# Altium PCB shouhuoj.PcbDoc
Units mm, origin at the board's own origin, x right, y up, seen from the top; angles counter-clockwise.
Board outline 125.22 x 80.26 mm, 2 copper layers (Top Layer, Bottom Layer); 36 components, 52 nets, 207 pads, 0 vias.
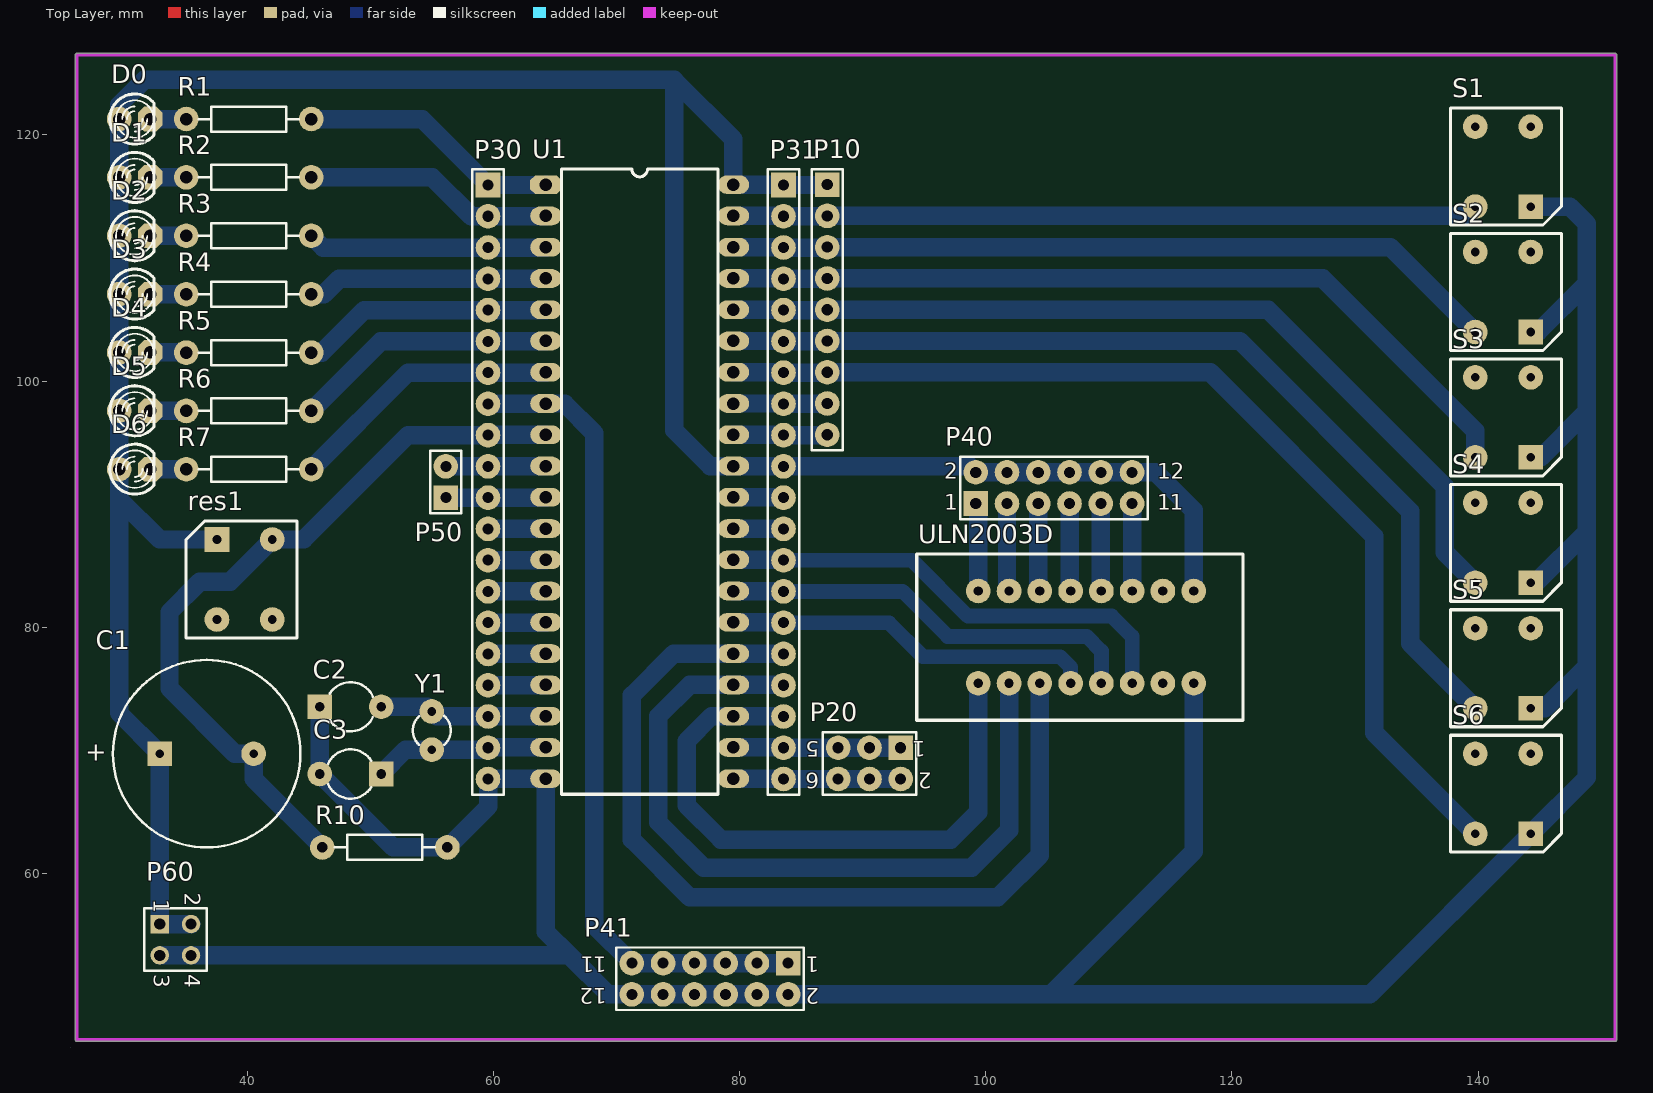
[diagram p0: Top Layer view]
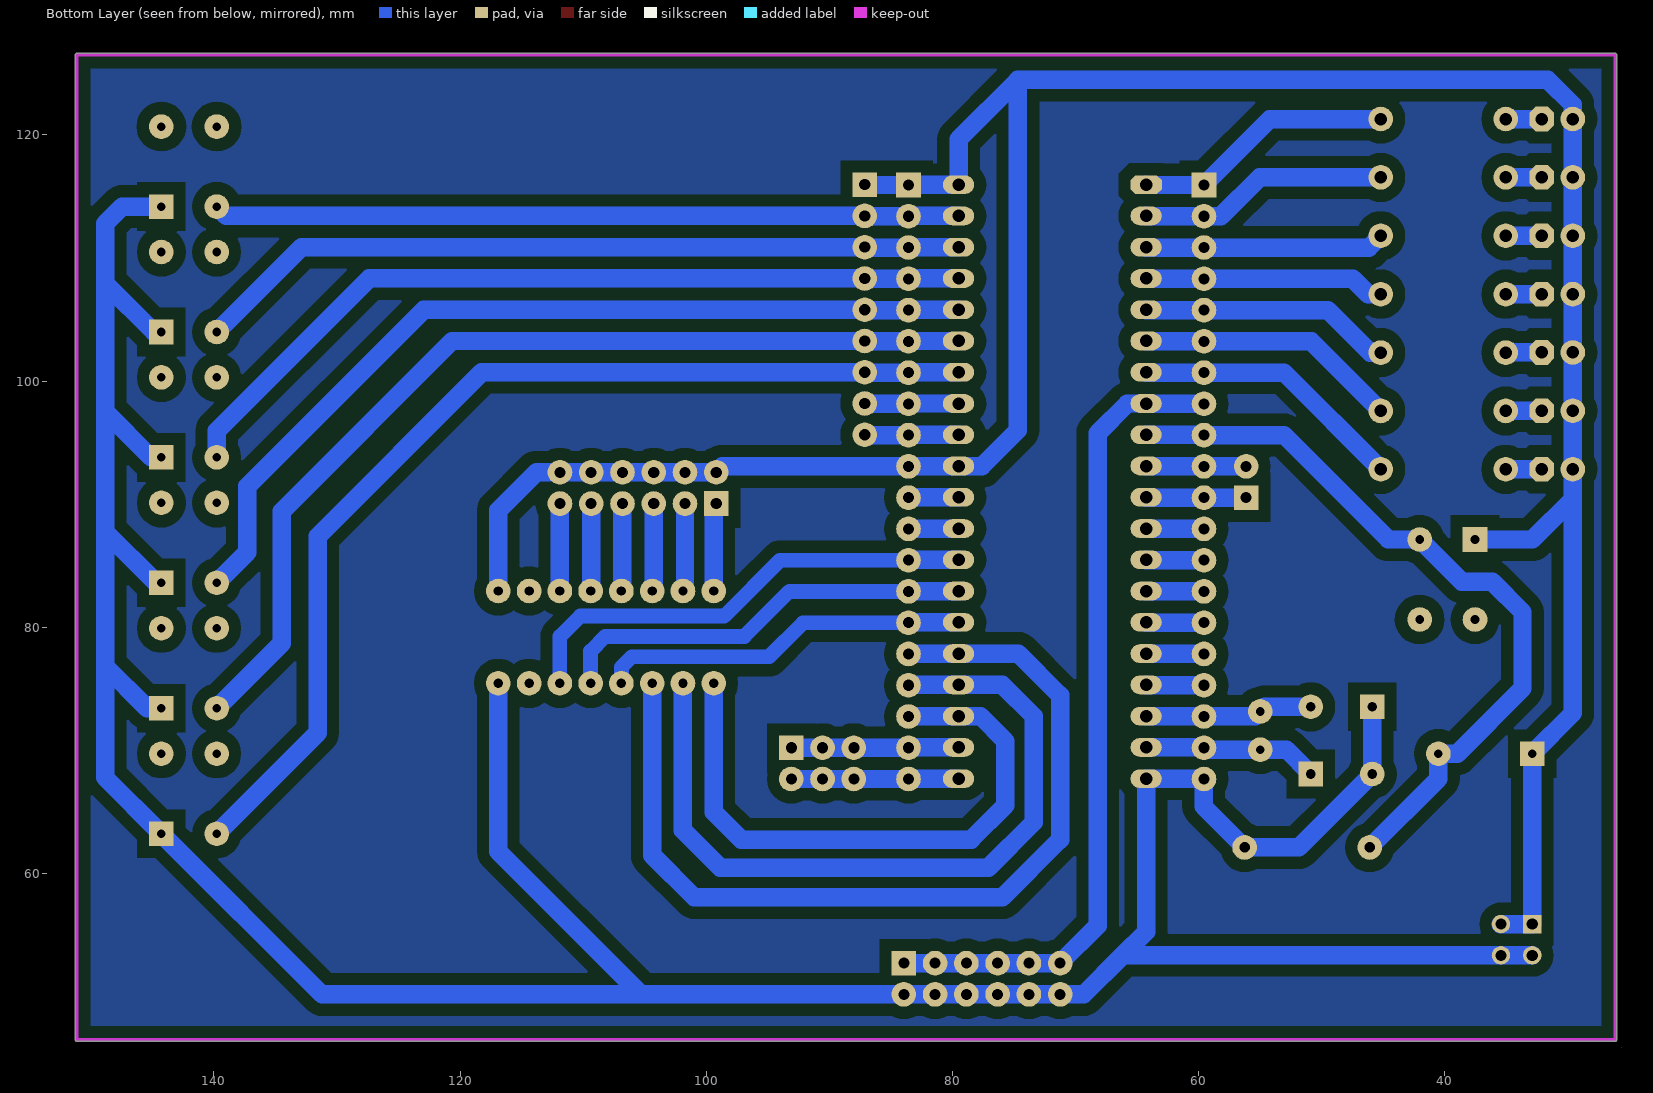
[diagram p1: Bottom Layer view, seen from below]

## Layer stack, top to bottom
Top Solder: solder mask 0.0102, Solder Resist, Dk 3.5
Top Layer: signal copper 0.0356
Dielectric1: dielectric 0.32, FR-4, Dk 4.8
Bottom Layer: signal copper 0.0356
Bottom Solder: solder mask 0.0102, Solder Resist, Dk 3.5

## Board outline
26.162,46.355 cw(c26.162,46.482) 26.035,46.482 26.035,126.492 cw(c26.162,126.492) 26.162,126.619 151.13,126.619 cw(c151.13,126.492) 151.257,126.492 151.257,46.482 cw(c151.13,46.482) 151.13,46.355
cut-out: 25.654,45.847

## Design rules (kind name [scope] priority, off if disabled: settings)
Clearance [All] p1: gap=0.254 ignorepadtopadclearanceinfootprint=FALSE
FabricationTestPointUsage TestPointUsage [All] p1: valid=0 allowmultiple=FALSE
FabricationTestpoint Testpoint [All] p1: side=3 testpointundercomponent=TRUE minsize=1.016 maxsize=2.54 preferedsize=1.524 minholesize=0 maxholesize=1.016 preferedholesize=0.813 testpointgrid=0.025 allowsidetop=TRUE allowsidebottom=TRUE usegrid=TRUE gridtolerance=0
PolygonConnect [All] p1: connectstyle=Relief reliefconductorwidth=0.254 reliefentries=4 polygonreliefangle="90 Angle" airgapwidth=0.254
RoutingLayers [All] p1: top layer_v5=FALSE bottom layer_v5=TRUE
RoutingVias [All] p1: holewidth=0.711 width=1.27 viastyle="Through Hole" minholewidth=0.711 minwidth=1.27 maxholewidth=0.711 maxwidth=1.27
SilkToSolderMaskClearance SilkscreenOverComponentPads [IsPad] p1: minsilkscreentomaskgap=0.254 clearancetoexposedcopper=TRUE
SolderMaskExpansion [All] p1: expansion=0.102
Width [All] p1: maxlimit=1.5 minlimit=1.2 preferedwidth=1.5
26 further rules are at their usual default settings.

## Components (designator, comment, footprint, x,y, rotation, side; value= is the part's Value field where it differs from the comment)
C1 "Cap Pol1" RB7.6-15 36.703,69.723 r180 top value=10pF
C2 "Cap" CAPR5-4X5 48.387,73.533 r0 top value=30pF
C3 "Cap" CAPR5-4X5 48.387,68.072 r180 top value=30pF
D0 "LED" My_LED3MM 30.861,121.285 r0 top
D1 "LED" My_LED3MM 30.861,116.544 r0 top
D2 "LED" My_LED3MM 30.861,111.802 r0 top
D3 "LED" My_LED3MM 30.861,107.061 r0 top
D4 "LED" My_LED3MM 30.861,102.32 r0 top
D5 "LED" My_LED3MM 30.861,97.578 r0 top
D6 "LED" My_LED3MM 30.861,92.837 r0 top
P10 "Header 9" HDR1X9 87.122,115.951 r270 top
P20 "Header 3X2" HDR2X3 93.091,70.204 r180 top
P30 "Header 20" HDR1X20 59.563,115.924 r270 top
P31 "Header 20" HDR1X20 83.566,115.924 r270 top
P40 "Header 6X2H" HDR2X6 99.187,90.043 r0 top
P41 "Header 6X2H" HDR2X6 83.947,52.705 r180 top
P50 "Header 2" HDR1X2 56.134,90.524 r90 top
P60 "Header 2X2" HDR2X2 32.893,55.88 r270 top
R1 "1k" My_axial-0.4 40.132,121.298 r0 top
R2 "1k" My_axial-0.4 40.132,116.554 r0 top
R3 "1k" My_axial-0.4 40.132,111.811 r0 top
R4 "1k" My_axial-0.4 40.132,107.067 r0 top
R5 "1k" My_axial-0.4 40.132,102.324 r0 top
R6 "1k" My_axial-0.4 40.132,97.58 r0 top
R7 "1k" My_axial-0.4 40.132,92.837 r0 top
R10 "Res2" AXIAL-0.4 51.181,62.103 r0 top value=10K
res1 "SW-PB" anjian 37.537,87.122 r0 top
S1 "SW-PB" anjian 144.272,114.173 r180 top
S2 "SW-PB" anjian 144.272,103.983 r180 top
S3 "SW-PB" anjian 144.272,93.793 r180 top
S4 "SW-PB" anjian 144.272,83.603 r180 top
S5 "SW-PB" anjian 144.272,73.413 r180 top
S6 "SW-PB" anjian 144.272,63.223 r180 top
U1 "89S52" My_DIP40 64.275,115.964 r0 top
ULN2003D "Component_1" PCBComponent_1 99.394,75.438 r90 top
Y1 "XTAL" R38 54.991,71.602 r180 top

## Footprints (in the part's own frame and the unit in brackets; to place one, negate y for a bottom-side part, rotate by r counter-clockwise, add the part's x,y. Pads: shape width x height; smd on the part's side, far side on the other; paste and mask are expansions set on the pad)
anjian [mm]
  rect 2x2 hole 0.7: 1(0,0)
  round 2 hole 0.7: 2(4.5,0) 3(4.5,-6.5) 4(0,-6.5)
  silkscreen extent -2.5,-8 6.5,1.5
AXIAL-0.4 [mm] "Axial Device, Thru-Hole; 2 Leads; 0.4 in Pin Spacing"
  round 2 hole 0.85: 1(-5.08,0) 2(5.08,0)
  silkscreen extent -4.06,-1.02 4.06,1.02
CAPR5-4X5 [mm] "Capacitor; 2 Leads"
  rect 2x2 hole 0.8: 1(-2.5,0)
  round 2 hole 0.8: 2(2.5,0)
  silkscreen extent -1.69,-2 1.82,2
HDR1X2 [mm] "Connector; Header; 2 Position"
  rect 2x2 hole 0.9: 1(0,0)
  round 2 hole 0.9: 2(2.54,0)
  silkscreen extent -1.27,-1.27 3.81,1.27
HDR1X9 [mm] "Connector; Header; 9 Position"
  rect 2x2 hole 0.9: 1(0,0)
  round 2 hole 0.9: 2(2.54,0) 3(5.08,0) 4(7.62,0) 5(10.16,0) 6(12.7,0) 7(15.24,0) 8(17.78,0) 9(20.32,0)
  silkscreen extent -1.27,-1.27 21.59,1.27
HDR1X20 [mm] "Connector; Header; 20 Position"
  rect 2x2 hole 0.9: 1(0,0)
  round 2 hole 0.9: 2(2.54,0) 3(5.08,0) 4(7.62,0) 5(10.16,0) 6(12.7,0) 7(15.24,0) 8(17.78,0) 9(20.32,0) 10(22.86,0) 11(25.4,0) 12(27.94,0) 13(30.48,0) 14(33.02,0) 15(35.56,0) 16(38.1,0) 17(40.64,0) 18(43.18,0) 19(45.72,0) 20(48.26,0)
  silkscreen extent -1.27,-1.27 49.53,1.27
HDR2X2 [mm] "Connector; Header; 2x2 Position"
  rect 1.5x1.5 hole 0.9: 1(0,0)
  round 1.5 hole 0.9: 2(0,2.54) 3(2.54,0) 4(2.54,2.54)
  silkscreen extent -1.27,-1.27 3.81,3.81
HDR2X3 [mm] "Connector; Header; 3x2 Position"
  rect 2x2 hole 0.9: 1(0,0)
  round 2 hole 0.9: 2(0,2.54) 3(2.54,0) 4(2.54,2.54) 5(5.08,0) 6(5.08,2.54)
  silkscreen extent -1.27,-1.27 6.35,3.81
HDR2X6 [mm] "Connector; Header; 6x2 Position"
  rect 2x2 hole 0.9: 1(0,0)
  round 2 hole 0.9: 2(0,2.54) 3(2.54,0) 4(2.54,2.54) 5(5.08,0) 6(5.08,2.54) 7(7.62,0) 8(7.62,2.54) 9(10.16,0) 10(10.16,2.54) 11(12.7,0) 12(12.7,2.54)
  silkscreen extent -1.27,-1.27 13.97,3.81
My_axial-0.4 [mil]
  round 78.74 hole 40: 1(-200.5,-0.5) 2(199.5,-0.5)
  silkscreen extent -160,-40 160,40
My_DIP40 [mil]
  oct 100x60 hole 40: 1(-0.5,-0.5)
  oval 100x60 hole 40: 2(-0.5,-100.5) 3(-0.5,-200.5) 4(-0.5,-300.5) 5(-0.5,-400.5) 6(-0.5,-500.5) 7(-0.5,-600.5) 8(-0.5,-700.5) 9(-0.5,-800.5) 10(-0.5,-900.5) 11(-0.5,-1000.5) 12(-0.5,-1100.5) 13(-0.5,-1200.5) 14(-0.5,-1300.5) 15(-0.5,-1400.5) 16(-0.5,-1500.5) 17(-0.5,-1600.5) 18(-0.5,-1700.5) 19(-0.5,-1800.5) 20(-0.5,-1900.5) 21(599.5,-1900.5) 22(599.5,-1800.5) 23(599.5,-1700.5) 24(599.5,-1600.5) 25(599.5,-1500.5) 26(599.5,-1400.5) 27(599.5,-1300.5) 28(599.5,-1200.5) 29(599.5,-1100.5) 30(599.5,-1000.5) 31(599.5,-900.5) 32(599.5,-800.5) 33(599.5,-700.5) 34(599.5,-600.5) 35(599.5,-500.5) 36(599.5,-400.5) 37(599.5,-300.5) 38(599.5,-200.5) 39(599.5,-100.5) 40(599.5,-0.5)
  silkscreen extent 50,-1950 550,50
My_LED3MM [mm]
  round 2 hole 1.016: A(-1.27,0)
  oct 2x2 hole 1.016: K(1.27,0)
  silkscreen extent -2.03,-2.03 1.57,2.03
PCBComponent_1 [mm]
  round 2 hole 0.762: 1(0,0) 2(0,-2.5) 3(0,-5) 4(0,-7.5) 5(0,-10) 6(0,-12.5) 7(0,-15) 8(0,-17.5) 9(7.5,-17.5) 10(7.5,-15) 11(7.5,-12.5) 12(7.5,-10) 13(7.5,-7.5) 14(7.5,-5) 15(7.5,-2.5) 16(7.5,0)
  silkscreen extent -3,-21.5 10.5,5
R38 [mm] "Crystal, Thru-Hole; 2 Leads; Body 3.1 x 8.2 mm (Dia.xH)"
  round 2 hole 0.7: 1(0,1.55) 2(0,-1.55)
  silkscreen extent -1.55,-1.19 1.55,1.17
RB7.6-15 [mm] "Polarized Capacitor (Radial); 2 Leads"
  rect 2x2 hole 0.7: 1(3.81,0)
  round 2 hole 0.7: 2(-3.81,0)
  silkscreen extent -7.62,-7.62 7.62,7.62

## Part data
C1: "Polarized Capacitor (Radial)", LatestRevisionDate=17-Jul-2002, LatestRevisionNote="Re-released for DXP Platform.", PackageDescription="Polarized Capacitor (Radial); 2 Leads", PackageReference=RB7.6-15, Published=8-Jun-2000, Publisher="Altium Limited"
C2 C3: "Capacitor", LatestRevisionDate=17-Jul-2002, LatestRevisionNote="Re-released for DXP Platform.", PackageReference=RAD-0.3, Published=8-Jun-2000, Publisher="Altium Limited"
D0 D1 D2 D3 D4 D5 D6: "Typical INFRARED GaAs LED", LatestRevisionDate=08-Jul-2005, LatestRevisionNote="Mech Layer 1 removed.", Published=8-Jun-2000, Publisher="Altium Limited"
P10: "Header, 9-Pin", LatestRevisionDate=17-Jul-2002, LatestRevisionNote="Re-released for DXP Platform.", Publisher="Altium Limited"
P20: "Header, 3-Pin, Dual row", LatestRevisionDate=17-Jul-2002, LatestRevisionNote="Re-released for DXP Platform.", Publisher="Altium Limited"
P30 P31: "Header, 20-Pin", LatestRevisionDate=17-Jul-2002, LatestRevisionNote="Re-released for DXP Platform.", Publisher="Altium Limited"
P40 P41: "Header, 6-Pin, Dual row, Right Angle", LatestRevisionDate=17-Jul-2002, LatestRevisionNote="Re-released for DXP Platform.", Publisher="Altium Limited"
P50: "Header, 2-Pin", LatestRevisionDate=17-Jul-2002, LatestRevisionNote="Re-released for DXP Platform.", Publisher="Altium Limited"
P60: "Header, 2-Pin, Dual row", LatestRevisionDate=17-Jul-2002, LatestRevisionNote="Re-released for DXP Platform.", Publisher="Altium Limited"
R1 R2 R3 R4 R5 R6 R7: library part Res, "resistor 1/4 wat"
R10: "Resistor", LatestRevisionDate=17-Jul-2002, LatestRevisionNote="Re-released for DXP Platform.", PackageReference=AXIAL-0.4, Published=8-Jun-2000, Publisher="Altium Limited"
res1 S1 S2 S3 S4 S5 S6: "Switch", LatestRevisionDate=17-Jul-2002, LatestRevisionNote="Re-released for DXP Platform.", PackageReference=SPST-2, Published=24-Mar-1999, Publisher="Altium Limited"
U1: "Atmel 89S52 Microcontroller"
Y1: "Crystal Oscillator", LatestRevisionDate=17-Jul-2002, LatestRevisionNote="Re-released for DXP Platform.", PackageReference=R38, Published=8-Jun-2000, Publisher="Altium Limited"

## Nets (pads, with @x,y where several pads share a name; then routed paths per layer and width w, separated by ;. In a path a pad name is that pad's centre, name@x,y a point inside that pad or via, vN(x,y) a via of type N, cw(c..) or ccw(c..) an arc to the next point about the centre after c; other vN are vias at no path point)
ALE: P31.11 U1.30 | length 4.1
  Bottom Layer w1.5: U1.30 83.539,90.551 P31.11
GND: C2.1 C3.2 P30.20 P41.2 P41.4 P41.6 P41.8 P41.10 P41.12 P60.3 P60.4 R10.2 S1.1 S2.1 S3.1 S4.1 S5.1 S6.1 U1.20 ULN2003D.8 | length 274.5
  Bottom Layer w1.5: P60.3 P60.4 66.167,53.34 ; C2.1 C3.2 51.856,62.103 R10.2 59.59,65.432 59.59,67.691 U1.20 64.262,55.245 66.167,53.34 ; ULN2003D.8 116.894,61.776 105.283,50.165 ; S5.1 145.422,73.413 148.844,76.835 ; S4.1 144.69,83.603 148.844,87.757 ; S3.1 145.101,93.793 148.844,97.536 ; S2.1 144.877,103.983 148.844,107.95 ; S1.1 147.447,114.173 148.844,112.776 148.844,107.95 ; 66.167,53.34 69.342,50.165 P41.12 P41.10 P41.8 P41.6 P41.4 P41.2 105.283,50.165 ; 105.283,50.165 131.214,50.165 S6.1 148.844,67.795 148.844,76.835 ; 148.844,76.835 148.844,87.757 ; 148.844,87.757 148.844,97.536 ; 148.844,97.536 148.844,107.95
Input1: P31.18 U1.23 ULN2003D.1 | length 50.2
  Bottom Layer w1.5: P31.18 83.539,72.771 U1.23 77.724,72.771 75.692,70.739 75.692,65.532 78.486,62.738 97.155,62.738 99.394,64.977 ULN2003D.1
Input2: P31.17 U1.24 ULN2003D.2 | length 63.1
  Bottom Layer w1.5: P31.17 83.539,75.311 U1.24 75.946,75.311 73.406,72.771 73.406,64.135 77.089,60.452 98.846,60.452 101.894,63.5 ULN2003D.2
Input3: P31.16 U1.25 ULN2003D.3 | length 75.9
  Bottom Layer w1.5: P31.16 83.539,77.851 U1.25 74.646,77.851 71.247,74.452 71.247,62.738 75.946,58.039 100.965,58.039 104.394,61.468 ULN2003D.3
Input4: P31.15 U1.26 ULN2003D.4 | length 30.2
  Bottom Layer w1.2: P31.15 92.132,80.364 94.899,77.597 106.044,77.597 106.894,76.747 ULN2003D.4
  Bottom Layer w1.5: U1.26 83.539,80.391 P31.15
Input5: P31.14 U1.27 ULN2003D.5 | length 34.5
  Bottom Layer w1.2: P31.14 93.245,82.904 96.901,79.248 108.204,79.248 109.394,78.058 ULN2003D.5
  Bottom Layer w1.5: U1.27 83.539,82.931 P31.14
Input6: P31.13 U1.28 ULN2003D.6 | length 38.8
  Bottom Layer w1.2: P31.13 94.007,85.444 98.552,80.899 110.23,80.899 111.894,79.235 ULN2003D.6
  Bottom Layer w1.5: U1.28 83.539,85.471 P31.13
InT0: P30.12 U1.12 | length 4.7
  Bottom Layer w1.5: P30.12 64.235,87.984 U1.12
InT1: P30.13 U1.13 | length 4.7
  Bottom Layer w1.5: P30.13 64.235,85.444 U1.13
NetD0_K: D0.K R1.1 | length 2.9
  Bottom Layer w1.5: D0.K R1.1
NetD1_K: D1.K R2.1 | length 2.9
  Bottom Layer w1.5: D1.K 35.037,116.544 R2.1
NetD2_K: D2.K R3.1 | length 2.9
  Bottom Layer w1.5: D2.K 35.035,111.802 R3.1
NetD3_K: D3.K R4.1 | length 2.9
  Bottom Layer w1.5: D3.K 35.033,107.061 R4.1
NetD4_K: D4.K R5.1 | length 2.9
  Bottom Layer w1.5: D4.K 35.031,102.32 R5.1
NetD5_K: D5.K R6.1 | length 2.9
  Bottom Layer w1.5: D5.K 35.029,97.578 R6.1
NetD6_K: D6.K R7.1 | length 2.9
  Bottom Layer w1.5: D6.K 35.027,92.837 R7.1
OUT1: P40.1 ULN2003D.16 | length 7.2
  Bottom Layer w1.5: P40.1 99.394,89.836 ULN2003D.16
OUT2: P40.3 ULN2003D.15 | length 7.2
  Bottom Layer w1.5: P40.3 101.727,83.105 ULN2003D.15
OUT3: P40.5 ULN2003D.14 | length 7.2
  Bottom Layer w1.5: P40.5 104.267,83.065 ULN2003D.14
OUT4: P40.7 ULN2003D.13 | length 7.1
  Bottom Layer w1.5: P40.7 106.807,83.025 ULN2003D.13
OUT5: P40.9 ULN2003D.12 | length 7.1
  Bottom Layer w1.5: P40.9 109.347,82.985 ULN2003D.12
OUT6: P40.11 ULN2003D.11 | length 7.1
  Bottom Layer w1.5: P40.11 111.887,82.945 ULN2003D.11
P00: P10.2 P31.2 S1.2 U1.39 | length 60.6
  Bottom Layer w1.5: U1.39 83.539,113.411 P31.2 87.095,113.384 P10.2 139.01,113.411 S1.2
P01: P10.3 P31.3 S2.2 U1.38 | length 63.1
  Bottom Layer w1.5: U1.38 83.539,110.871 P31.3 87.095,110.844 P10.3 132.884,110.871 S2.2
P02: P10.4 P31.4 S3.2 U1.37 | length 67.6
  Bottom Layer w1.5: U1.37 83.539,108.331 P31.4 87.095,108.304 P10.4 127.381,108.331 139.772,95.94 S3.2
P03: P10.5 P31.5 S4.2 U1.36 | length 72.6
  Bottom Layer w1.5: U1.36 83.539,105.791 P31.5 87.095,105.764 P10.5 122.936,105.791 137.287,91.44 137.287,86.088 S4.2
P04: P10.6 P31.6 S5.2 U1.35 | length 78.9
  Bottom Layer w1.5: U1.35 83.539,103.251 P31.6 87.095,103.224 P10.6 120.65,103.251 134.493,89.408 134.493,78.692 S5.2
P05: P10.7 P31.7 S6.2 U1.34 | length 85.2
  Bottom Layer w1.5: U1.34 83.539,100.711 P31.7 87.095,100.684 P10.7 118.237,100.711 131.572,87.376 131.572,71.423 S6.2
P06: P10.8 P31.8 U1.33 | length 7.6
  Bottom Layer w1.5: U1.33 83.539,98.171 P31.8 87.095,98.144 P10.8
P07: P10.9 P31.9 U1.32 | length 7.6
  Bottom Layer w1.5: U1.32 83.539,95.631 P31.9 87.095,95.604 P10.9
P10: P30.1 R1.2 U1.1 | length 21.3
  Bottom Layer w1.5: R1.2 54.202,121.285 P30.1 64.235,115.924 U1.1
P11: P30.2 R2.2 U1.2 | length 20.4
  Bottom Layer w1.5: R2.2 55.035,116.542 58.193,113.384 P30.2 64.235,113.384 U1.2
P12: P30.3 R3.2 U1.3 | length 19.5
  Bottom Layer w1.5: R3.2 46.153,110.844 P30.3 64.235,110.844 U1.3
P13: P30.4 R4.2 U1.4 | length 19.6
  Bottom Layer w1.5: R4.2 46.222,107.055 47.471,108.304 P30.4 64.235,108.304 U1.4
P14: P30.5 R5.2 U1.5 | length 20.5
  Bottom Layer w1.5: R5.2 46.05,102.311 49.503,105.764 P30.5 64.235,105.764 U1.5
P15: P30.6 R6.2 U1.6 | length 21.4
  Bottom Layer w1.5: R6.2 50.856,103.224 P30.6 64.235,103.224 U1.6
P16: P30.7 R7.2 U1.7 | length 22.3
  Bottom Layer w1.5: R7.2 53.059,100.684 P30.7 64.235,100.684 U1.7
P17: P30.8 P41.1 P41.3 P41.5 P41.7 P41.9 P41.11 U1.8 | length 66.7
  Bottom Layer w1.5: P30.8 64.235,98.144 U1.8 65.786,98.171 68.199,95.758 68.199,55.753 P41.11 P41.9 P41.7 P41.5 P41.3 P41.1
PSEN: P31.12 U1.29 | length 4.1
  Bottom Layer w1.5: U1.29 83.539,88.011 P31.12
RD: P30.17 U1.17 | length 4.7
  Bottom Layer w1.5: P30.17 64.235,75.284 U1.17
REST: C1.2 P30.9 R10.1 res1.2 U1.9 | length 61.7
  Bottom Layer w1.5: R10.1 40.513,67.691 C1.2 38.989,69.723 33.682,75.03 33.682,81.23 36.145,83.693 38.608,83.693 res1.2 44.577,87.122 53.059,95.604 P30.9 59.59,95.631 U1.9
RX: P30.10 P50.2 U1.10 | length 8.1
  Bottom Layer w1.5: P50.2 P30.10 64.235,93.064 U1.10
SCL: P20.1 P20.3 P20.5 P31.19 U1.22 | length 13.6
  Bottom Layer w1.5: U1.22 83.539,70.231 P31.19 P20.5 P20.3 P20.1
SDA: P20.2 P20.4 P20.6 P31.20 U1.21 | length 13.6
  Bottom Layer w1.5: U1.21 83.539,67.691 P31.20 P20.6 P20.4 P20.2
T0: P30.14 U1.14 | length 4.7
  Bottom Layer w1.5: P30.14 64.235,82.904 U1.14
T1: P30.15 U1.15 | length 4.7
  Bottom Layer w1.5: P30.15 64.235,80.364 U1.15
TX: P30.11 P50.1 U1.11 | length 8.1
  Bottom Layer w1.5: P50.1 P30.11 64.235,90.524 U1.11
VCC: C1.1 D0.A D1.A D2.A D3.A D4.A D5.A D6.A P10.1 P31.1 P31.10 P40.2 P40.4 P40.6 P40.8 P40.10 P40.12 P60.1 P60.2 res1.1 U1.31 U1.40 ULN2003D.9 | length 223.8
  Bottom Layer w1.5: P60.2 P60.1 C1.1 29.591,73.025 29.591,90.424 ; res1.1 32.893,87.122 29.591,90.424 ; P10.1 87.095,115.924 P31.1 83.539,115.951 U1.40 79.502,119.634 74.676,124.46 ; ULN2003D.9 116.894,89.481 113.792,92.583 P40.12 P40.10 P40.8 P40.6 P40.4 P40.2 98.706,93.064 P31.10 83.539,93.091 U1.31 77.597,93.091 74.676,96.012 74.676,124.46 ; 29.591,90.424 D6.A D5.A D4.A D3.A D2.A D1.A D0.A 29.591,122.428 31.623,124.46 74.676,124.46
WR: P30.16 U1.16 | length 4.7
  Bottom Layer w1.5: P30.16 64.235,77.824 U1.16
XTAL1: C2.2 P30.18 U1.18 Y1.2 | length 13.7
  Bottom Layer w1.5: C2.2 54.61,73.533 Y1.2 55.399,72.744 P30.18 64.235,72.744 U1.18
XTAL2: C3.1 P30.19 U1.19 Y1.1 | length 14.3
  Bottom Layer w1.5: C3.1 52.867,70.052 Y1.1 59.411,70.052 P30.19 59.59,70.231 U1.19
pads on no net: res1.3 res1.4 S1.3 S1.4 S2.3 S2.4 S3.3 S3.4 S4.3 S4.4 S5.3 S5.4 S6.3 S6.4 ULN2003D.7 ULN2003D.10

## Polygon pours and split planes (outlines as drawn)
no net on Bottom Layer (solid, pour order 0): 26.67,125.857 26.924,126.111 150.749,126.111 150.749,47.244 150.876,47.117 150.622,46.863 26.543,46.863

## Keep-outs
Keep-Out Layer:
  lines w0.254: 26.162,46.482 26.162,126.492 151.13,126.492 151.13,46.482 26.162,46.482

## Text inside footprints (layer, text, board x,y; h text height)
C1: Top Overlay "+" at 28.571,70.46 h1.5 r180
P20: Top Overlay "6" at 86.487,68.172 h1.27 r180; Top Overlay "5" at 86.487,70.712 h1.27 r180; Top Overlay "2" at 95.631,68.172 h1.27 r180; Top Overlay "1" at 95.123,70.712 h1.27 r180
P40: Top Overlay "12" at 113.919,92.075 h1.27; Top Overlay "1" at 114.935,89.535 h1.27; Top Overlay "1" at 113.919,89.535 h1.27; Top Overlay "1" at 96.647,89.535 h1.27; Top Overlay "2" at 96.647,92.075 h1.27
P41: Top Overlay "12" at 69.215,50.673 h1.27 r180; Top Overlay "1" at 68.199,53.213 h1.27 r180; Top Overlay "1" at 69.215,53.213 h1.27 r180; Top Overlay "1" at 86.487,53.213 h1.27 r180; Top Overlay "2" at 86.487,50.673 h1.27 r180
P60: Top Overlay "1" at 32.385,57.912 h1.27 r270; Top Overlay "2" at 34.925,58.42 h1.27 r270; Top Overlay "4" at 34.925,51.816 h1.27 r270; Top Overlay "3" at 32.385,51.816 h1.27 r270